# EAGLE board fatteningFarm (EAGLE 9.6.2)
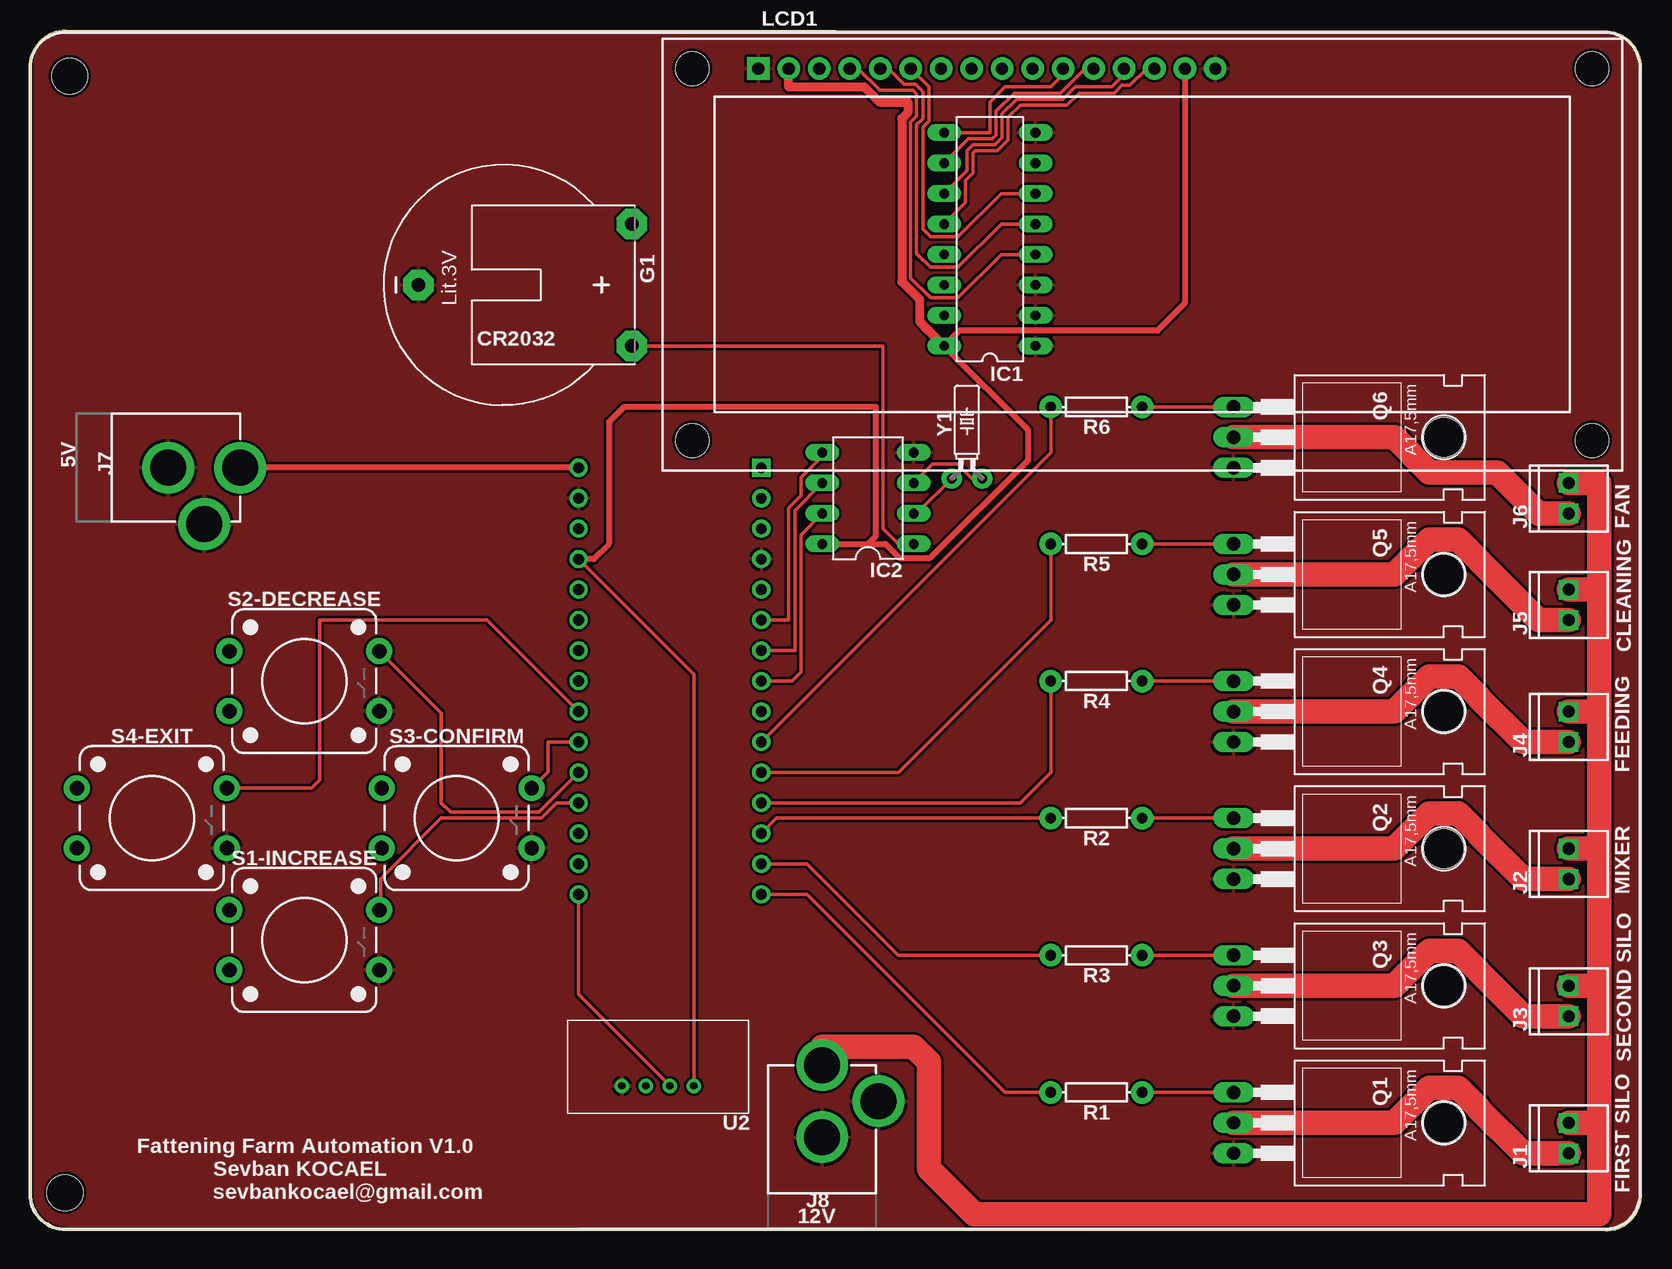
[diagram p0: board, top side]
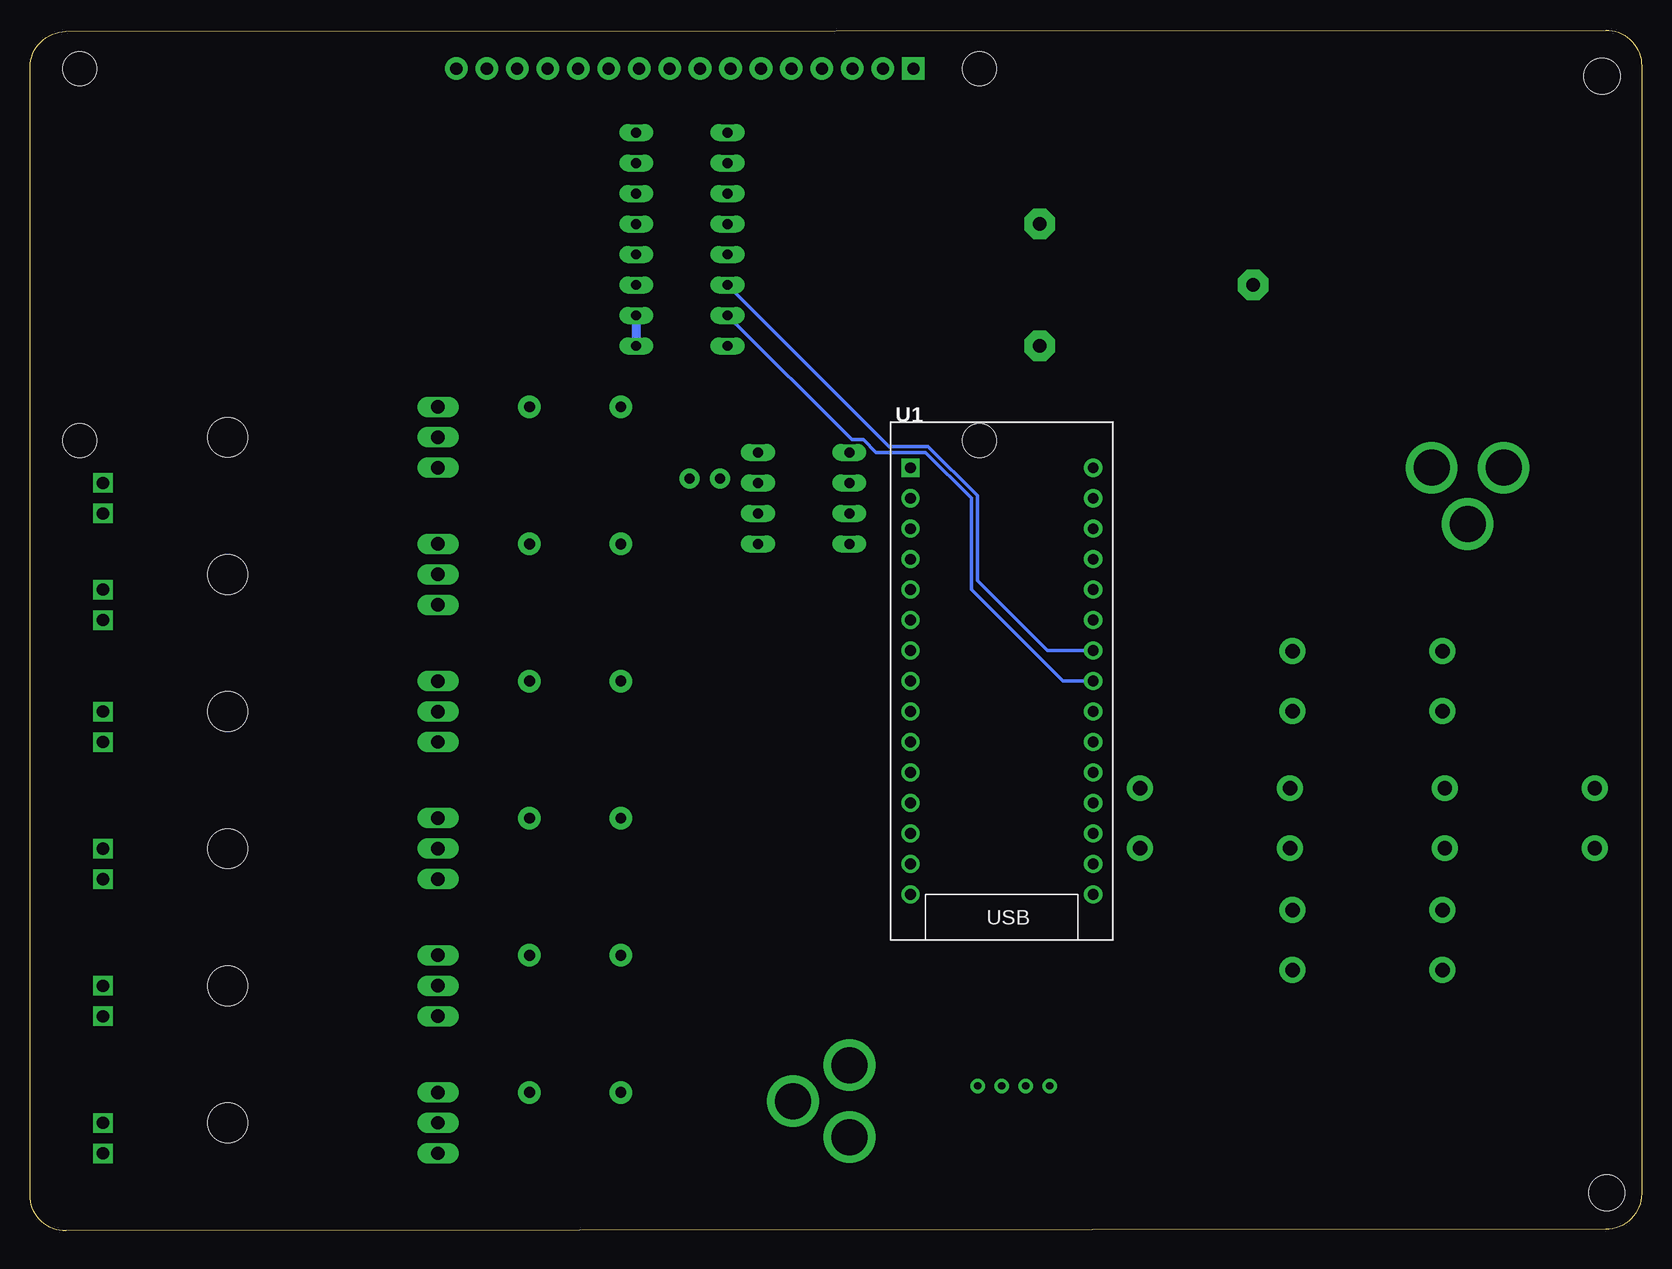
[diagram p1: board, bottom side, seen from below]

Size 134.35 x 100.12 mm. Coordinates in mm from the lower left corner, seen from the top.
Outline: 3,0.12 131.34,0 arc90 134.35,3 134.35,97 arc90 131.35,100 3,100.12 arc90 0,97.12 0,3.12 arc90 3,0.12
Copper layers (1*16): Top 0.035mm / dielectric 1.5mm / Bottom 0.035mm
Design rules "SparkFun": minimum track width 8mil, minimum drill 20mil, track to track 8mil, track to pad 8mil, pad to pad 8mil, via to via 8mil, smd to smd 8mil, copper to edge 10mil, drill to drill 8mil, minimum pad ring 12mil, minimum via ring 10mil, stop-mask expansion 4mil, vias tented up to drill 25mil, thermal gap 10mil
Holes 3 mm at 3.3,96.26 2.92,3.17

## Footprints (pad centres in the part's own frame; a part is rotated, then mirrored left to right if it is on the bottom)
CR2032H = drill 1.118 pad 2.54 octagon: + 5.08,10.795; +@1 -5.08,10.795; - 0,-6.985
DIL16 = drill 0.813 long: 1 -8.89,-3.81; 2 -6.35,-3.81; 3 -3.81,-3.81; 4 -1.27,-3.81; 5 1.27,-3.81; 6 3.81,-3.81; 7 6.35,-3.81; 8 8.89,-3.81; 9 8.89,3.81; 10 6.35,3.81; 11 3.81,3.81; 12 1.27,3.81; 13 -1.27,3.81; 14 -3.81,3.81; 15 -6.35,3.81; 16 -8.89,3.81
DIL08 = drill 0.813 long: -RST 3.81,3.81; GND 3.81,-3.81; I/O 1.27,3.81; SCLK -1.27,3.81; VCC1 -3.81,3.81; VCC2 -3.81,-3.81; X1 -1.27,-3.81; X2 1.27,-3.81
1X02_2.54_SCREWTERM = drill 1.016 square: P1 2.54,0; P2 0,0
POWER_JACK_PTH = drill 2.997 pad 4.318: GND 0,7.7; GNDBREAK 4.7,10.7; PWR 0,13.7
LCD-16X2 = drill 1.016 pad 1.88 square: 1 -32,15.5 | drill 1.016 pad 1.88: 2 -29.46,15.5; 3 -26.92,15.5; 4 -24.38,15.5; 5 -21.84,15.5; 6 -19.3,15.5; 7 -16.76,15.5; 8 -14.22,15.5; 9 -11.68,15.5; 10 -9.14,15.5; 11 -6.6,15.5; 12 -4.06,15.5; 13 -1.52,15.5; 14 1.02,15.5; 15 3.56,15.5; 16 6.1,15.5 | hole 2.8: -37.5,15.5; -37.5,-15.5; 37.5,15.5; 37.5,-15.5
TO220BH = drill 1.118 long: D 0,-6.35; G -2.54,-6.35; S 2.54,-6.35 | hole 3.302: 0,11.176
AXIAL-0.3 = drill 0.9 pad 1.88: P$1 -3.81,0; P$2 3.81,0
TACTILE_SWITCH_PTH_12MM = drill 1.2 pad 2.159: 1 6.25,-2.5; 2 -6.25,-2.5; 3 6.25,2.5; 4 -6.25,2.5
ARDUINO_NANO = drill 0.9: 3V3 7.62,-20.32; 5V 7.62,5.08; A0 7.62,-15.24; A1 7.62,-12.7; A2 7.62,-10.16; A3 7.62,-7.62; A4 7.62,-5.08; A5 7.62,-2.54; A6 7.62,0; A7 7.62,2.54; D2 -7.62,2.54; D3 -7.62,0; D4 -7.62,-2.54; D5 -7.62,-5.08; D6 -7.62,-7.62; D7 -7.62,-10.16; D8 -7.62,-12.7; D9 -7.62,-15.24; D10 -7.62,-17.78; D11 -7.62,-20.32; D12 -7.62,-22.86; D13 7.62,-22.86; GND@1 -7.62,5.08; GND@2 7.62,10.16; REF 7.62,-17.78; RST@1 -7.62,7.62; RST@2 7.62,7.62; RX0 -7.62,10.16; VIN 7.62,12.7 | drill 0.9 square: TX1 -7.62,12.7
DHT22 = drill 0.6: 1 -2,2; 2 0,2; 3 2,2; 4 4,2
CRYSTAL-PTH-2X6-CYL = drill 0.813 pad 1.676: 1 -1.27,0; 2 1.27,0

## Placement (x,y rotation side)
G1  CR2032H  [CR2032H]  39.37,78.86 270 top
IC1  PCF8574P  [DIL16]  80.01,82.67 90 top
IC2  DS1302  [DIL08]  69.85,61.08 90 top
J1  First Silo  [1X02_2.54_SCREWTERM]  128.27,6.47 90 top
J2  Mixer  [1X02_2.54_SCREWTERM]  128.27,29.33 90 top
J3  Second Silo  [1X02_2.54_SCREWTERM]  128.27,17.9 90 top
J4  Feeding  [1X02_2.54_SCREWTERM]  128.27,40.76 90 top
J5  Cleaning  [1X02_2.54_SCREWTERM]  128.27,50.92 90 top
J6  Fan  [1X02_2.54_SCREWTERM]  128.27,59.81 90 top
J7  POWER 5V  [POWER_JACK_PTH]  3.81,63.62 270 top
J8  POWER 12V  [POWER_JACK_PTH]  66.04,0.12 0 top
LCD1  LCD-16X2SILK  [LCD-16X2]  92.71,81.4 0 top
Q1  IRLZ44Z  [TO220BH]  106.68,9.01 270 top
Q2  IRLZ44Z  [TO220BH]  106.68,31.87 270 top
Q3  IRLZ44Z  [TO220BH]  106.68,20.44 270 top
Q4  IRLZ44Z  [TO220BH]  106.68,43.3 270 top
Q5  IRLZ44Z  [TO220BH]  106.68,54.73 270 top
Q6  IRLZ44Z  [TO220BH]  106.68,66.16 270 top
R1  1k  [AXIAL-0.3]  88.9,11.55 180 top
R2  1k  [AXIAL-0.3]  88.9,34.41 180 top
R3  1k  [AXIAL-0.3]  88.9,22.98 180 top
R4  1k  [AXIAL-0.3]  88.9,45.84 180 top
R5  1k  [AXIAL-0.3]  88.9,57.27 180 top
R6  1k  [AXIAL-0.3]  88.9,68.7 180 top
S1-INCREASE  SWITCH 12MM  [TACTILE_SWITCH_PTH_12MM]  22.86,24.25 0 top
S2-DECREASE  SWITCH 12MM  [TACTILE_SWITCH_PTH_12MM]  22.86,45.84 0 top
S3-CONFIRM  SWITCH 12MM  [TACTILE_SWITCH_PTH_12MM]  35.56,34.41 0 top
S4-EXIT  SWITCH 12MM  [TACTILE_SWITCH_PTH_12MM]  10.16,34.41 0 top
U1  ARDUINO NANO  [ARDUINO_NANO]  53.34,50.92 0 bottom
U2  DHT22  [DHT22]  53.34,14.09 180 top
Y1  32.768kHz  [CRYSTAL-PTH-2X6-CYL]  78.11,62.74 0 top

## Library data of the parts
G1 = battery
IC1 = micro-philips; MPN: PCF8574PN; OC_FARNELL: 204020; OC_NEWARK: 11N8515
IC2 = DS1302
J1-J6 = SparkFun-Connectors
J7 J8 = SparkFun-Connectors; PROD_ID: CONN-08197
LCD1 = SparkFun-Displays; PROD_ID: LCD-12633; SF_ID: LCD-00255
Q1-Q6 = transistor-power
R1-R6 = SparkFun-Resistors; PROD_ID: RES-08380
S1-INCREASE S2-DECREASE S3-CONFIRM S4-EXIT = SparkFun-Switches; PROD_ID: SWCH-09185; SF_SKU: COM-09190
U1 U2 = LezzetliRobotTarifleri
Y1 = SparkFun-Clocks; PROD_ID: XTAL-10112

## Nets
12V: J1.P1 J2.P1 J3.P1 J4.P1 J5.P1 J6.P1 J8.PWR
A0: S1-INCREASE.3 U1.A0
A1: S2-DECREASE.3 U1.A1
A2: S3-CONFIRM.3 U1.A2
A3: S4-EXIT.3 U1.A3
D3: IC2.-RST U1.D3
D4: IC2.I/O U1.D4
D5: IC2.SCLK U1.D5
D7: R6.P$2 U1.D7
D8: R5.P$2 U1.D8
D9: R4.P$2 U1.D9
D10: R2.P$2 U1.D10
D11: R3.P$2 U1.D11
D12: R1.P$2 U1.D12
D13: U1.D13 U2.2
GND: G1.- IC1.1 IC1.2 IC1.3 IC1.8 IC2.GND J7.GND J7.GNDBREAK J8.GND J8.GNDBREAK LCD1.1 LCD1.16 Q1.S Q2.S Q3.S Q4.S Q5.S Q6.S S1-INCREASE.1 S2-DECREASE.1 S3-CONFIRM.1 S4-EXIT.1 U1.GND@1 U1.GND@2 U2.4
N$1: IC2.X1 Y1.1
N$2: Q1.G R1.P$1
N$7: J1.P2 Q1.D
N$8: IC1.4 LCD1.4
N$9: IC2.X2 Y1.2
N$18: Q2.G R2.P$1
N$30: IC1.5 LCD1.5
N$31: IC1.6 LCD1.6
N$32: IC1.9 LCD1.11
N$33: IC1.10 LCD1.12
N$34: IC1.11 LCD1.13
N$35: IC1.12 LCD1.14
N$36: J2.P2 Q2.D
N$37: Q3.G R3.P$1
N$38: J3.P2 Q3.D
N$39: Q4.G R4.P$1
N$40: J4.P2 Q4.D
N$41: Q5.G R5.P$1
N$42: J5.P2 Q5.D
N$43: Q6.G R6.P$1
N$44: J6.P2 Q6.D
SCL: IC1.14 U1.A5
SDA: IC1.15 U1.A4
VCC: IC1.16 IC2.VCC1 LCD1.2 LCD1.15 U1.5V U2.1
VCC2: G1.+ IC2.VCC2
VIN: J7.PWR U1.VIN

## Tracks (layer width: path | path; a pad name or v marks a point on that pad's centre or on a via)
12V
  Top 2.032: J1.P1 130.81,9.01 | 130.81,9.01 130.81,20.44 | 130.81,20.44 J3.P1 | 130.81,20.44 130.81,31.87 | 130.81,31.87 J2.P1 | 130.81,31.87 130.81,43.3 | 130.81,43.3 J4.P1 | 130.81,43.3 130.81,53.46 | 130.81,53.46 J5.P1 | 130.81,53.46 130.81,62.35 J6.P1 | 130.81,9.01 130.81,1.39 78.74,1.39 74.93,5.2 74.93,14.09 73.66,15.36 66.04,15.36 J8.PWR
A0
  Top 0.305: U1.A0 43.9,35.68 42.63,34.41 34.29,34.41 29.21,29.33 29.21,26.85 S1-INCREASE.3
A1
  Top 0.305: S2-DECREASE.3 34.29,43.16 34.29,35.68 35.05,34.92 42.42,34.92 U1.A1
A2
  Top 0.305: S3-CONFIRM.3 43.18,38.28 43.18,40.76 U1.A2
A3
  Top 0.305: S4-EXIT.3 16.45,36.95 23.49,36.95 24.13,37.59 24.13,50.92 38.1,50.92 U1.A3
D3
  Top 0.305: U1.D3 63.25,50.92 63.25,60.28 64.26,61.29 64.26,62.8 66.04,64.57 IC2.-RST
D4
  Top 0.305: IC2.I/O 63.75,60.07 63.75,48.38 U1.D4
D5
  Top 0.305: IC2.SCLK 64.26,58.04 64.26,46.61 63.5,45.84 U1.D5
D7
  Top 0.305: R6.P$2 85.09,64.89 U1.D7
D8
  Top 0.305: U1.D8 72.39,38.22 85.09,50.92 R5.P$2
D9
  Top 0.305: U1.D9 82.55,35.68 85.09,38.22 R4.P$2
D10
  Top 0.305: R2.P$2 62.23,34.41 U1.D10
D11
  Top 0.305: U1.D11 64.77,30.6 72.39,22.98 R3.P$2
D12
  Top 0.305: U1.D12 64.77,28.06 81.28,11.55 R1.P$2
D13
  Top 0.305: U2.2 45.72,19.71 U1.D13
GND
  Bottom 0.762: IC1.2 IC1.1
  pour Top: -2.54,102.99 135.89,102.99 135.89,-2.42 -2.54,-2.42
N$1
  Top 0.305: Y1.1 73.91,59.81 IC2.X1
N$2
  Top 0.305: R1.P$1 Q1.G
N$7
  Top 2.032: Q1.D 113.73,9.01 116.65,11.94 119.07,11.94 120.78,10.22 120.78,10.16 124.46,6.47 J1.P2
N$8
  Top 0.305: IC1.4 80.96,81.4 77.35,77.8 75.05,77.8 73.41,79.44 73.41,92.43 73.91,92.94 73.91,94.78 73.6,95.1 70.84,95.1 69.04,96.9 LCD1.4
N$9
  Top 0.305: Y1.2 78.52,62.74 77.33,63.93 75.23,63.93 IC2.X2
N$18
  Top 0.305: Q2.G R2.P$1
N$30
  Top 0.305: IC1.5 80.96,83.94 77.35,80.34 75.05,80.34 73.91,81.47 73.91,92.22 74.42,92.72 74.42,94.99 73.81,95.61 72.87,95.61 71.58,96.9 LCD1.5
N$31
  Top 0.305: IC1.6 80.96,86.48 77.35,82.88 75.05,82.88 74.42,83.5 74.42,92.01 74.93,92.51 74.93,95.38 LCD1.6
N$32
  Top 0.305: IC1.9 80.01,91.56 80.01,94.1 81.28,95.37 85.09,95.37 86.11,96.39 LCD1.11
N$33
  Top 0.305: IC1.10 78.23,91.06 80.22,91.06 80.52,91.35 80.52,93.34 82.04,94.87 85.9,94.87 87.94,96.9 LCD1.12
N$34
  Top 0.305: IC1.11 78.11,88.39 78.11,90.04 78.61,90.55 80.43,90.55 81.03,91.14 81.03,93.13 82.25,94.36 86.11,94.36 87.13,95.37 90.17,95.37 91.19,96.39 LCD1.13
N$35
  Top 0.305: IC1.12 77.98,85.72 77.98,87.54 78.61,88.18 78.61,89.83 78.82,90.04 80.64,90.04 81.53,90.93 81.53,92.83 82.55,93.85 86.44,93.85 87.46,94.87 90.38,94.87 91.02,95.5 91.69,95.5 93.1,96.9 LCD1.14
N$36
  Top 2.032: Q2.D 113.73,31.87 116.65,34.8 119.07,34.8 120.78,33.08 120.78,33.02 124.46,29.33 J2.P2
N$37
  Top 0.305: R3.P$1 Q3.G
N$38
  Top 2.032: Q3.D 113.73,20.44 116.65,23.37 119.07,23.37 120.78,21.65 120.78,21.59 124.46,17.9 J3.P2
N$39
  Top 0.305: Q4.G R4.P$1
N$40
  Top 2.032: Q4.D 113.73,43.3 116.65,46.23 119.07,46.23 120.78,44.51 120.78,44.45 124.46,40.76 J4.P2
N$41
  Top 0.305: Q5.G R5.P$1
N$42
  Top 2.032: Q5.D 113.73,54.73 116.65,57.66 119.07,57.66 120.78,55.94 120.78,55.88 125.73,50.92 J5.P2
N$43
  Top 0.305: R6.P$1 Q6.G
N$44
  Top 2.032: Q6.D 113.73,66.16 116.65,63.24 122.3,63.24 125.73,59.81 J6.P2
SCL
  Bottom 0.305: IC1.14 62.74,65.4 59.48,65.4 55.37,61.29 55.37,54.23 49.53,48.38 U1.A5
SDA
  Bottom 0.305: IC1.15 65.84,65.96 64.89,65.96 63.82,64.89 59.69,64.89 55.88,61.08 55.88,53.46 48.26,45.84 U1.A4
VCC
  Top 0.305: U2.1 55.34,46.38 U1.5V
  Top 0.508: LCD1.15 96.27,77.34 93.98,75.05 77.47,75.05 IC1.16 83.21,66.77 83.21,64.28 75.03,56.11 72.47,56.11 71.3,57.27 69.85,57.27 | IC2.VCC1 69.85,57.27 | 69.85,57.27 70.51,57.93 70.51,68.7 49.53,68.7 48.26,67.43 48.26,57.27 46.99,56 U1.5V
  Top 0.762: IC1.16 74.95,75.03 74.17,75.81 74.17,77.63 72.67,79.13 72.67,92.73 73.18,93.24 73.18,94.1 70.8,94.1 69.53,95.37 63.25,95.37 LCD1.2
VCC2
  Top 0.305: IC2.VCC2 72.39,57.27 71.12,58.54 71.12,73.78 G1.+
VIN
  Top 0.508: U1.VIN J7.PWR

## Text on the board
tNames: CR2032 | 5V | FAN | CLEANING | FEEDING | MIXER | SECOND SILO | Fattening Farm Automation V1.0 | Sevban KOCAEL / sevbankocael@gmail.com | FIRST SILO | 12V